# EAGLE board wDuino (EAGLE 6.6.0)
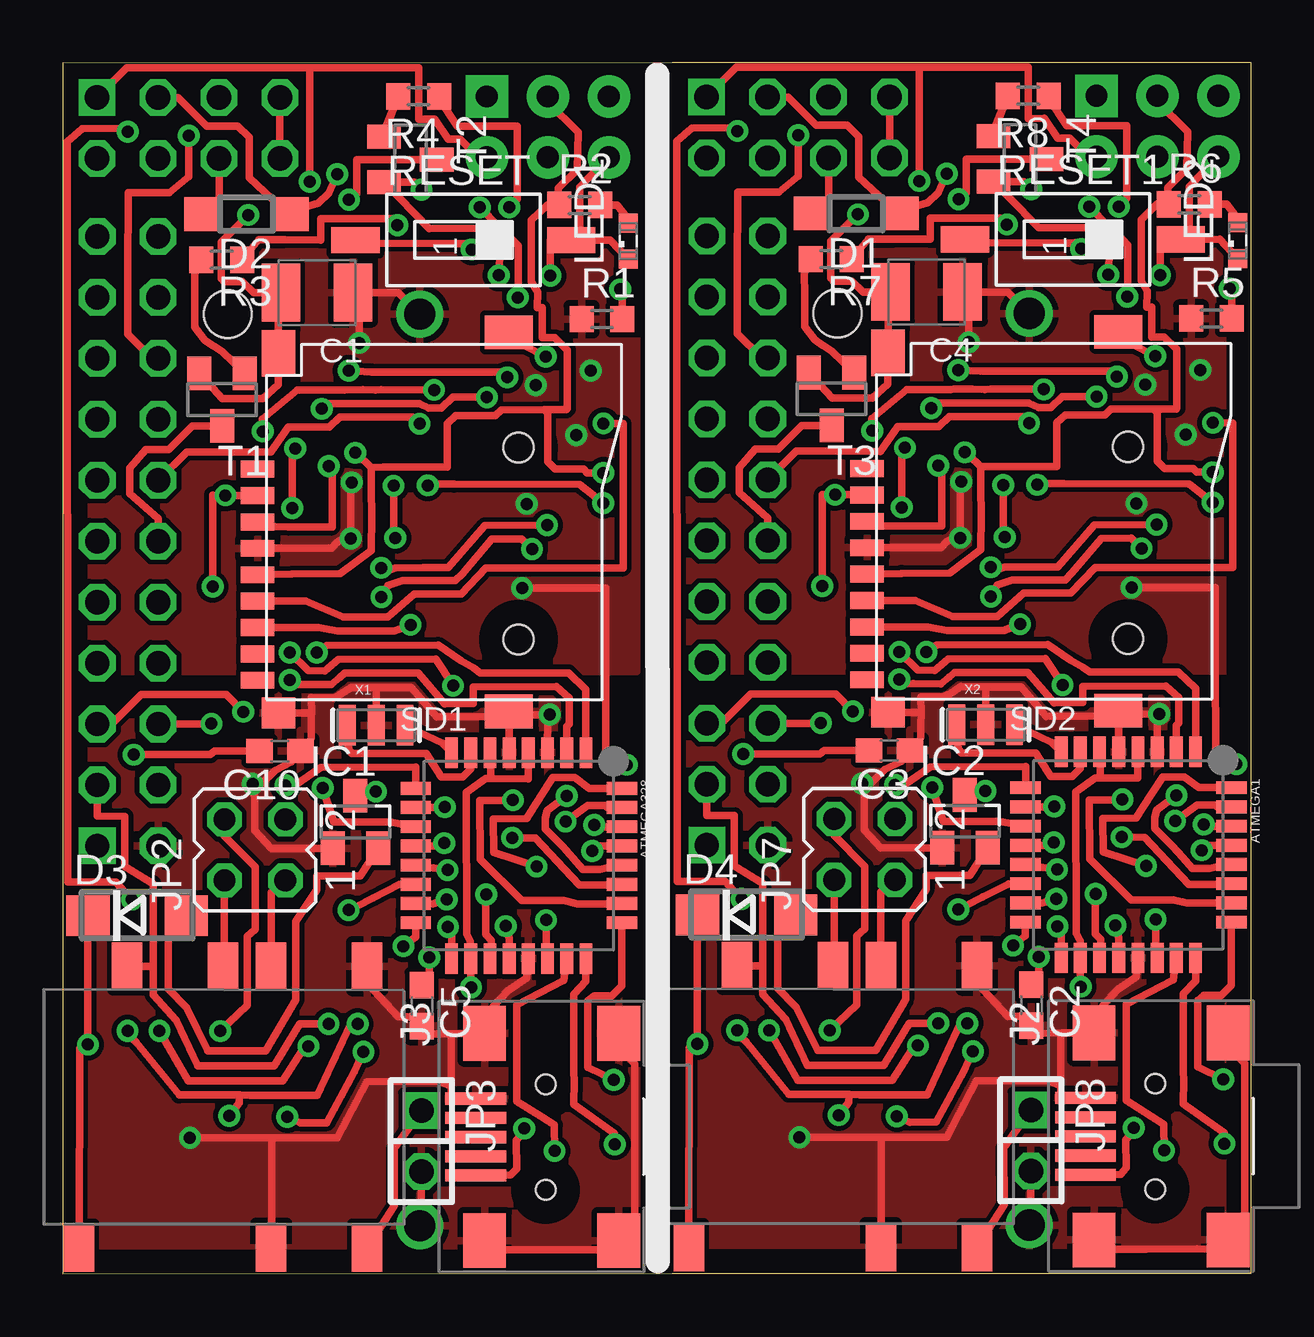
[diagram p0: board, top side]
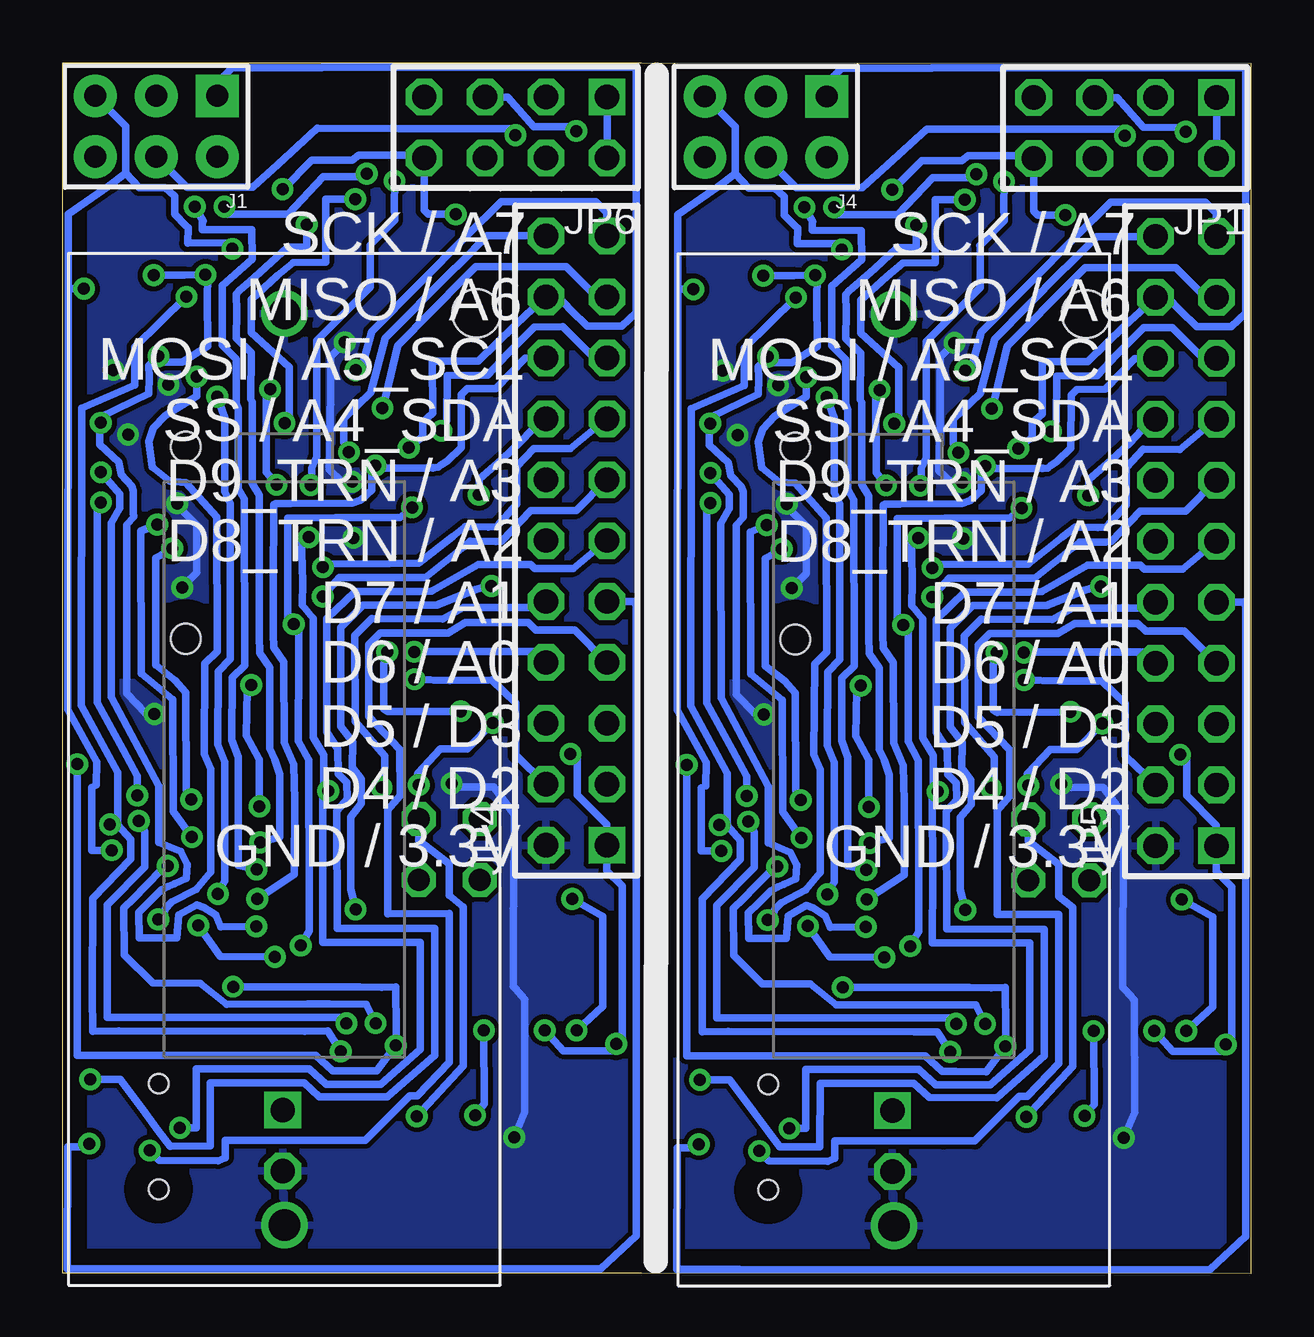
[diagram p1: board, bottom side, seen from below]

Size 49.51 x 50.5 mm. Coordinates in mm from the lower left corner, seen from the top.
Outline: 25.42,0.03 0,0 0,50.47 25.42,50.5
Outline: 25.4,0.03 49.51,0.03 49.51,50.49 25.4,50.49
Copper layers (1*16): Top 0.035mm / dielectric 1.5mm / Bottom 0.035mm
Design rules "default": minimum track width 10mil, minimum drill 24mil, track to track 8mil, track to pad 8mil, pad to pad 8mil, via to via 8mil, smd to smd 8mil, copper to edge 40mil, drill to drill 8mil, minimum pad ring 10mil, minimum via ring 8mil, stop-mask expansion 4mil, vias tented up to drill 0mil, thermal gap 10mil
Net classes: 1 power: width 0.381 mm, clearance 0.254 mm

## Footprints (pad centres in the part's own frame; a part is rotated, then mirrored left to right if it is on the bottom)
TQFP32-08 = smd 1.27 x 0.533: 1 -4.293,2.8; 2 -4.293,2; 3 -4.293,1.2; 4 -4.293,0.4; 5 -4.293,-0.4; 6 -4.293,-1.2; 7 -4.293,-2; 8 -4.293,-2.8; 17 4.293,-2.8; 18 4.293,-2; 19 4.293,-1.2; 20 4.293,-0.4; 21 4.293,0.4; 22 4.293,1.2; 23 4.293,2; 24 4.293,2.8 | smd 0.533 x 1.27: 9 -2.8,-4.293; 10 -2,-4.293; 11 -1.2,-4.293; 12 -0.4,-4.293; 13 0.4,-4.293; 14 1.2,-4.293; 15 2,-4.293; 16 2.8,-4.293; 25 2.8,4.293; 26 2,4.293; 27 1.2,4.293; 28 0.4,4.293; 29 -0.4,4.293; 30 -1.2,4.293; 31 -2,4.293; 32 -2.8,4.293
SMC_B = smd 1.6 x 2.4: + -1.5,0; - 1.5,0
C0603 = smd 1.1 x 1: 1 -0.85,0; 2 0.85,0
SOD123 = smd 1.4 x 1.4: A 1.9,0; C -1.9,0
DO214AC = smd 1.8 x 1.7: A 2.05,0; C -2.05,0
SOT23 = smd 1 x 1.4: 1 -0.95,-1.1; 2 0.95,-1.1; 3 0,1.1
HEAD3X2 = drill 0.914 pad 1.778 square: 1 0,0 | drill 0.914 pad 1.778: 2 0,2.54; 3 2.54,0; 4 2.54,2.54; 5 5.08,0; 6 5.08,2.54
USB-MINI-B_2 = smd 0.508 x 2.54: 1 0,0; 2 0.8,0; 3 1.6,0; 4 2.4,0; 5 3.2,0 | smd 2.286 x 1.778: 6 -2.717,5.948; 7 -2.717,0.36; 8 5.918,0.36; 9 5.918,5.948 | hole 0.813: -0.6,2.9; 3.8,2.9
2X04 = drill 1.016 square: 1 -3.81,-1.27 | drill 1.016 octagon: 2 -3.81,1.27; 3 -1.27,-1.27; 4 -1.27,1.27; 5 1.27,-1.27; 6 1.27,1.27; 7 3.81,-1.27; 8 3.81,1.27
JP2Q = drill 0.914 octagon: 1 -1.27,-1.27; 2 1.27,-1.27; 3 -1.27,1.27; 4 1.27,1.27
1X02 = drill 1.016 square: 1 -1.27,0 | drill 1.016 octagon: 2 1.27,0
2X11 = drill 1.016 square: 1 -12.7,-1.27 | drill 1.016 octagon: 2 -12.7,1.27; 3 -10.16,-1.27; 4 -10.16,1.27; 5 -7.62,-1.27; 6 -7.62,1.27; 7 -5.08,-1.27; 8 -5.08,1.27; 9 -2.54,-1.27; 10 -2.54,1.27; 11 0,-1.27; 12 0,1.27; 13 2.54,-1.27; 14 2.54,1.27; 15 5.08,-1.27; 16 5.08,1.27; 17 7.62,-1.27; 18 7.62,1.27; 19 10.16,-1.27; 20 10.16,1.27; 21 12.7,-1.27; 22 12.7,1.27
SML0603 = smd 0.8 x 0.8: A 0.75,0; C -0.75,0
R0603 = smd 1 x 1.1: 1 -0.85,0; 2 0.85,0
SMS-001 = smd 1.092 x 2.007: 1 0,-4.496; 2 0,4.496
TF-PULL = smd 0.7 x 1.4: 1 -2.2,-7.62; 2 -1.1,-7.62; 3 0,-7.62; 4 1.1,-7.62; 5 2.2,-7.62; 6 3.3,-7.62; 7 4.4,-7.62; 8 5.5,-7.62; 9 6.6,-7.62 | smd 1.4 x 2: S1 -7.9,2.85; S2 7.9,2.85 | smd 1.28 x 1.4: S3 7.96,-6.75 | smd 1.95 x 1.4: S4 -7.025,-6.75 | hole 1.25: -3.1,3.25; 4.9,3.25
KEYSTONE-2/3A = drill 1.3: +VE 0,19; -VE 0,-19 | hole 2: 8,19
ESP03 = smd 1.27 x 2: WIFI_EN 3.27,-6; WIFI_GND -6.73,-6; WIFI_GPIO15 -2.73,5.73; WIFI_RX -0.73,-6; WIFI_SWL -6.73,5.73; WIFI_TX -2.73,-6; WIFI_VDD 5.27,5.73
RESONATOR-SMD = smd 0.7 x 1.7: 1 -1.2,0; 2 0,0; 3 1.2,0

## Placement (x,y rotation side)
ATMEGA1  ATMega-328  [TQFP32-08]  44.39,17.47 270 top
ATMEGA328  ATMega-328  [TQFP32-08]  18.99,17.44 270 top
C1  100uF  [SMC_B]  10.59,40.9 180 top
C2  0.1  [C0603]  40.35,11.21 270 top
C3  100nF  [C0603]  34.44,21.83 180 top
C4  100uF  [SMC_B]  35.99,40.93 180 top
C5  0.1  [C0603]  14.95,11.18 270 top
C10  100nF  [C0603]  9.04,21.8 180 top
D1  [SOD123]  33.05,44.2 180 top
D2  [SOD123]  7.65,44.17 180 top
D3  [DO214AC]  3.09,14.94 0 top
D4  [DO214AC]  28.49,14.96 0 top
IC1  MCP1703CB  [SOT23]  12.19,18.84 0 top
IC2  MCP1703CB  [SOT23]  37.59,18.87 0 top
J1  HEAD3X2  [HEAD3X2]  43.06,49.11 180 bottom
J2  USB-MINI-B%C  [USB-MINI-B_2]  42.61,7.34 270 top
J3  USB-MINI-B%C  [USB-MINI-B_2]  17.21,7.31 270 top
J4  HEAD3X2  [HEAD3X2]  17.67,49.08 180 bottom
JP1  [2X04]  5.23,47.76 180 bottom
JP2  [JP2Q]  8,17.67 90 top
JP3  [1X02]  14.94,5.54 270 top
JP4  [2X11]  28.1,30.57 90 bottom
JP5  [2X11]  2.7,30.54 90 bottom
JP6  [2X04]  30.63,47.79 180 bottom
JP7  [JP2Q]  33.4,17.69 90 top
JP8  [1X02]  40.33,5.56 270 top
LED1  [SML0603]  23.55,43.05 90 top
LED2  [SML0603]  48.95,43.07 90 top
R1  10k  [R0603]  22.46,39.8 0 top
R2  220  [R0603]  21.53,44.56 0 top
R3  1 K  [R0603]  6.61,42.27 180 top
R4  1 K  [R0603]  14.82,49.09 180 top
R5  10k  [R0603]  47.86,39.82 0 top
R6  220  [R0603]  46.93,44.58 0 top
R7  1 K  [R0603]  32.01,42.3 180 top
R8  1 K  [R0603]  40.22,49.11 180 top
RESET  [SMS-001]  16.68,43.1 270 top
RESET1  [SMS-001]  42.08,43.12 270 top
SD1  TF-HOLDER  [TF-PULL]  15.73,31.35 270 top
SD2  TF-HOLDER  [TF-PULL]  41.13,31.37 270 top
T1  BC846  [SOT23]  6.63,36.45 180 top
T2  BC846  [SOT23]  14.48,46.45 270 top
T3  BC846  [SOT23]  32.03,36.47 180 top
T4  BC846  [SOT23]  39.88,46.48 270 top
U$1  BATT-CR123A  [KEYSTONE-2/3A]  40.27,21.04 0 bottom
U$2  ESP03  [ESP03]  31.35,6.85 180 top
U$3  BATT-CR123A  [KEYSTONE-2/3A]  14.87,21.01 0 bottom
U$5  ESP03  [ESP03]  5.95,6.82 180 top
X1  16 MHz  [RESONATOR-SMD]  13.05,22.87 0 top
X2  16 MHz  [RESONATOR-SMD]  38.45,22.9 0 top

## Library data of the parts
ATMEGA1 ATMEGA328 = LowPowerLab
C1-C5 C10 R1-R8 = resistor
D1-D4 = diode
IC1 IC2 = mcp1703
J1-J4 = MyCON2
JP1 JP3-JP6 JP8 = pinhead
JP2 JP7 = jumper
LED1 LED2 = led
RESET RESET1 = smd-special
SD1 SD2 = sd-mmc
T1-T4 = transistor
U$1 U$3 = eagle-library-edeca.net-v5
U$2 U$5 = RemoteHome
X1 X2 = SparkFun

## Nets
5V: IC1.3 J3.5 J4.2 JP1.1 JP1.2
5V1: IC2.3 J1.2 J2.5 JP6.1 JP6.2
A0: ATMEGA328.23 JP5.7
A1: ATMEGA328.24 JP5.9
A2: ATMEGA328.25 JP5.11
A3: ATMEGA328.26 JP5.13
A4: ATMEGA1.22 JP4.21
A4_SDA: ATMEGA328.27 JP5.15
A4_SDA1: ATMEGA1.27 JP4.15
A5: ATMEGA1.19 JP4.19
A5_SCL: ATMEGA328.28 JP5.17
A5_SCL1: ATMEGA1.28 JP4.17
A6: ATMEGA328.19 JP5.19
A7: ATMEGA328.22 JP5.21
A8: ATMEGA1.26 JP4.13
A9: ATMEGA1.25 JP4.11
A10: ATMEGA1.24 JP4.9
A11: ATMEGA1.23 JP4.7
AREF: ATMEGA328.20 C5.1
AREF1: ATMEGA1.20 C2.1
D0_RX: ATMEGA328.30 D2.C JP1.3 JP2.2
D0_RX1: ATMEGA1.30 D1.C JP6.3 JP7.2
D1: ATMEGA1.13 R8.1
D1_TX: ATMEGA328.31 JP1.5 JP2.4
D1_TX1: ATMEGA1.31 JP6.5 JP7.4
D2: ATMEGA328.32 JP5.3 U$5.WIFI_EN
D3: ATMEGA328.1 JP5.5
D4: ATMEGA328.2 JP5.4
D5: ATMEGA328.9 JP5.6
D6: ATMEGA328.10 JP5.8
D7: ATMEGA328.11 JP5.10
D8: ATMEGA328.12 R3.1
D8_P: JP5.12 T1.3
D8_P1: JP4.12 T3.3
D9: ATMEGA328.13 R4.1
D9_P: JP5.14 T2.3
D9_P1: JP4.14 T4.3
D10: ATMEGA1.12 R7.1
D10_SS: ATMEGA328.14 JP5.16 SD1.2
D10_SS1: ATMEGA1.14 JP4.16 SD2.2
D11: ATMEGA1.11 JP4.10
D11_MOSI: ATMEGA328.15 J4.4 JP5.18 SD1.3
D11_MOSI1: ATMEGA1.15 J1.4 JP4.18 SD2.3
D12: ATMEGA1.10 JP4.8
D12_MISO: ATMEGA328.16 J4.1 JP5.20 SD1.7
D12_MISO1: ATMEGA1.16 J1.1 JP4.20 SD2.7
D13: ATMEGA1.9 JP4.6
D13_SCK: ATMEGA328.17 J4.3 JP5.22 R2.1 SD1.5
D13_SCK1: ATMEGA1.17 J1.3 JP4.22 R6.1 SD2.5
D14: ATMEGA1.2 JP4.4
D15: ATMEGA1.1 JP4.5
D16: ATMEGA1.32 JP4.3 U$2.WIFI_EN
GND: ATMEGA328.3 ATMEGA328.5 ATMEGA328.21 C1.- C5.2 C10.1 IC1.1 J3.1 J3.6 J3.7 J3.8 J3.9 J4.6 JP1.7 JP1.8 JP3.2 JP5.2 LED1.C RESET.2 SD1.6 SD1.S1 SD1.S2 SD1.S3 SD1.S4 T1.2 T2.2 U$3.-VE U$5.WIFI_GND U$5.WIFI_GPIO15 X1.2
GND1: ATMEGA1.3 ATMEGA1.5 ATMEGA1.21 C2.2 C3.1 C4.- IC2.1 J1.6 J2.1 J2.6 J2.7 J2.8 J2.9 JP4.2 JP6.7 JP6.8 JP8.2 LED2.C RESET1.2 SD2.6 SD2.S1 SD2.S2 SD2.S3 SD2.S4 T3.2 T4.2 U$1.-VE U$2.WIFI_GND U$2.WIFI_GPIO15 X2.2
N$1: ATMEGA328.7 X1.1
N$2: D3.A IC1.2
N$3: ATMEGA1.7 X2.1
N$4: LED1.A R2.2
N$5: JP3.1 U$5.WIFI_SWL
N$6: R4.2 T2.1
N$7: D2.A JP1.6
N$8: R3.2 T1.1
N$9: ATMEGA1.8 X2.3
N$10: JP2.1 U$5.WIFI_TX
N$11: JP2.3 U$5.WIFI_RX
N$12: JP7.1 U$2.WIFI_TX
N$13: JP7.3 U$2.WIFI_RX
N$14: LED2.A R6.2
N$15: D1.A JP6.6
N$16: R7.2 T3.1
N$17: R8.2 T4.1
N$18: D4.A IC2.2
N$19: JP8.1 U$2.WIFI_SWL
N$21: ATMEGA328.8 X1.3
RST: ATMEGA328.29 J4.5 R1.2 RESET.1
RST1: ATMEGA1.29 J1.5 R5.2 RESET1.1
VCC: ATMEGA328.4 ATMEGA328.6 ATMEGA328.18 C1.+ C10.2 D3.C JP5.1 R1.1 SD1.4 U$3.+VE U$5.WIFI_VDD
VCC1: ATMEGA1.4 ATMEGA1.6 ATMEGA1.18 C3.2 C4.+ D4.C JP4.1 R5.1 SD2.4 U$1.+VE U$2.WIFI_VDD

## Tracks (layer width: path | path; a pad name or v marks a point on that pad's centre or on a via)
5V  (via drill 0.5)
  Top 0.305: 17.17,4.07 J3.5 18.67,4.12 18.91,4.39 18.89,5.57 19.2,5.92 v19.22,6.07 | v13.78,32.86 13.78,30.8 v13.85,30.68 | IC1.3 12.92,19.94 v13.04,20.1 | 10.28,50.27 14.34,50.27 14.83,50.27 14.83,48.13 15.48,48.14 16.06,47.31 16.55,47.31 17.32,46.54 J4.2 | 10.28,50.27 2.66,50.27 JP1.1 | v10.28,45.53 10.28,50.22 10.28,50.27
  Bottom 0.305: v13.78,32.86 13.74,33.2 13.73,33.56 13.52,34.04 13.52,37.72 13.52,38.38 13.52,38.87 11.28,41.11 11.28,42.85 11.3,42.87 11.16,43 10.28,43.9 10.29,44.49 v10.28,45.53 | v13.85,30.68 14.12,30.55 14.14,30.07 14.11,28.82 14.12,27.86 13.67,27.3 13.67,22.35 13.23,21.61 13.23,20.22 v13.04,20.1 13.27,19.82 13.26,16.58 13.28,13.8 9.21,13.79 9.2,9.34 10.86,7.88 13.13,7.88 13.84,8.53 18.54,8.52 18.54,6.07 v19.22,6.07 | JP1.2 JP1.1
5V1  (via drill 0.5)
  Top 0.305: 42.57,4.1 J2.5 44.07,4.15 44.3,4.42 44.29,5.6 44.6,5.95 v44.62,6.09 | v39.18,32.88 39.18,30.82 v39.25,30.71 | IC2.3 38.31,19.97 v38.44,20.13 | 35.67,50.3 39.74,50.3 40.23,50.3 40.23,48.16 40.88,48.17 41.46,47.33 41.95,47.33 42.72,46.57 J1.2 | 35.67,50.3 28.06,50.3 JP6.1 | v35.68,45.56 35.68,50.25 35.67,50.3
  Bottom 0.305: v39.18,32.88 39.13,33.23 39.12,33.59 38.92,34.06 38.92,37.75 38.92,38.4 38.92,38.9 36.68,41.14 36.68,42.88 36.7,42.89 36.56,43.03 35.68,43.92 35.69,44.52 v35.68,45.56 | v39.25,30.71 39.52,30.57 39.53,30.1 39.51,28.84 39.52,27.89 39.07,27.33 39.06,22.37 38.63,21.64 38.63,20.25 v38.44,20.13 38.67,19.84 38.66,16.61 38.67,13.82 34.61,13.82 34.6,9.37 36.26,7.91 38.53,7.9 39.24,8.56 43.94,8.54 43.94,6.1 v44.62,6.09 | JP6.2 JP6.1
A0  (via drill 0.5)
  Top 0.305: ATMEGA328.23 20.87,12.23 18.9,11.21 18.9,7.88 18.9,7.2 19.95,6.54 20.47,6.21 v20.48,5.12
  Bottom 0.305: v20.48,5.12 20.08,4.71 17.63,4.7 17.33,4.82 17.34,5.55 12.81,5.55 11.49,5.55 9.64,7.4 9.32,7.4 8,8.79 8,12.01 8,15 10.57,14.98 10.57,18.19 10.57,19.32 10.04,19.92 10.05,21.84 11.36,23.21 11.36,26.22 10.88,26.7 8.03,26.69 7.33,27.12 6.19,27.12 4.7,27.12 4.39,26.81 2.77,26.81 JP5.7
A1  (via drill 0.5)
  Top 0.305: ATMEGA328.24 21.79,12.2 21.29,11.65 21.29,8.41 21.3,8.08 21.29,7.07 22.98,5.87 v23,5.41
  Bottom 0.305: v23,5.41 23.14,5.27 23.91,5.27 23.91,0.19 21.32,0.2 20.56,0.18 1.68,0.19 0.2,1.57 0.2,27.86 0.34,28 JP5.9
A2  (via drill 0.5)
  Top 0.305: ATMEGA328.25 23.29,12.01 22.87,11.59 22.14,11.59 21.88,11.39 21.88,8.62 v22.95,8.09
  Bottom 0.305: v22.95,8.09 21.71,8.1 20.66,6.69 20.11,5.94 19.63,5.3 17.96,5.31 17.95,7.94 14.05,7.94 13.41,7.36 10.59,7.35 8.61,9.1 8.6,14.37 12.67,14.38 12.7,19.28 12.38,19.62 12.26,19.78 12.27,20.47 12.63,20.82 12.64,21.87 13.11,22.57 13.1,26.15 13.11,27.29 11.92,28.42 9.24,28.42 8.72,28.44 6.8,29.55 6.48,29.55 5.24,29.55 4.61,29.55 4.44,29.39 2.83,29.39 JP5.11
A3  (via drill 0.5)
  Top 0.305: v13.27,28.21 13.54,28.69 14.16,28.91 16.36,28.91 16.63,29.18 17.87,30.64 19.12,30.64 19.51,30.25 v19.55,30.22 | v18.75,19.75 18.57,19.74 17.37,19.73 17.39,17.28 19.12,15.56 20.87,15.56 21.43,15.44 ATMEGA328.26
  Bottom 0.305: v13.27,28.21 12.57,29 9,29 7.37,30.31 7.12,30.52 6.05,30.51 5.81,30.52 4.6,31.8 2.72,31.8 JP5.13 | v19.55,30.22 20.24,29.83 20.23,25.35 19.41,24.71 18.98,24.22 18.96,20.16 v18.75,19.75
A4  (via drill 0.5)
  Top 0.305: v37.3,37.68 38.25,37.62 43.63,37.62 43.91,37.51 v43.92,37.4 | v45.53,14.78 45.54,13.23 ATMEGA1.22
  Bottom 0.305: v37.3,37.68 37.05,37.77 36.63,39.28 32.7,43.26 31.23,44.7 27.3,44.7 26.83,44.24 JP4.21 | v43.92,37.4 43.92,36.6 45.23,35.78 45.73,35.25 45.92,34.69 45.77,33.64 45.05,33.04 44.37,32.98 43.09,31.54 43.06,25.94 43.58,25.44 43.6,21.68 43.34,21.06 43.34,16.77 43.94,16.04 44.96,15.5 45.23,15.21 45.34,14.91 v45.53,14.78
A4_SDA  (via drill 0.5)
  Top 0.305: v13.26,29.43 13.38,29.29 13.84,29.43 15.02,29.44 16.06,29.44 17.58,31.19 v20.17,31.21 | v18.72,18.18 19.67,18.18 21.51,16.21 23.25,16.21 ATMEGA328.27
  Bottom 0.305: v13.26,29.43 v13.26,29.44 13.12,29.57 10.51,29.59 9.28,29.6 7.85,30.72 7.33,31.13 6.37,31.11 6.03,31.13 5.18,32.06 5.19,33.62 4.47,34.38 2.95,34.37 JP5.15 | v20.17,31.21 20.85,30.93 20.84,25.01 19.53,23.93 19.51,19.26 v18.72,18.18
A4_SDA1  (via drill 0.5)
  Top 0.305: v38.66,29.46 38.78,29.31 39.24,29.46 40.42,29.47 41.46,29.46 42.98,31.22 v45.57,31.24 | v44.12,18.21 45.07,18.2 46.91,16.23 48.65,16.23 ATMEGA1.27
  Bottom 0.305: v38.66,29.46 38.52,29.6 35.91,29.62 34.68,29.63 33.25,30.74 32.72,31.15 31.77,31.14 31.42,31.16 30.58,32.08 30.59,33.65 29.87,34.4 28.35,34.4 JP4.15 | v38.66,29.46 | v45.57,31.24 46.24,30.96 46.24,25.04 44.93,23.95 44.91,19.29 v44.12,18.21
A5  (via drill 0.5)
  Top 0.305: v36.18,36.09 36.49,36.3 40.24,36.3 40.65,36.12 41.17,36.12 41.63,36.57 42.34,36.57 v43.07,36.57 | ATMEGA1.19 43.25,13.23 43.25,13.94 43.01,14.18 43.01,15.81 v43.04,15.84
  Bottom 0.305: v36.18,36.09 36.05,36.6 35.54,38.7 32.73,41.54 32.29,41.98 28.52,41.98 27.27,40.73 JP4.19 | v43.07,36.57 42.75,35.7 42.74,32.6 42.53,32.11 42.52,25.63 43.02,25.12 43.05,22.06 42.75,21.34 42.75,21.13 42.75,20.56 42.76,16.38 v43.04,15.84
A5_SCL  (via drill 0.5)
  Top 0.305: ATMEGA328.28 22.66,16.93 22.36,16.87 21.66,16.87 21.26,17.33 20.83,17.82 20.11,18.55 20.09,19 20.18,19.31 v21,19.92 | v8.32,35.12 8.31,35.64 9.77,36.85 11.59,36.85 11.72,36.85 12.5,36.86 13.01,36.84 13.26,36.86 v15.47,36.85 | v22.51,32.14 21.53,32.9 16.3,32.92 15.74,32.91 15.32,32.92 v15.2,32.87
  Bottom 0.305: v21,19.92 21,20.74 21.59,21.82 22.66,23.8 22.67,31.94 22.63,32.1 v22.51,32.14 | v8.32,35.12 8.1,35.54 8.08,37.43 6.39,37.45 5.58,38.32 5.54,38.36 4.46,39.45 3.28,39.45 1.99,38.16 JP5.17 | v15.47,36.85 v15.47,36.84 15.62,36.69 15.62,33.41 v15.2,32.87
A5_SCL1  (via drill 0.5)
  Top 0.305: ATMEGA1.28 48.06,16.96 47.76,16.9 47.06,16.9 46.66,17.35 46.23,17.85 45.5,18.58 45.49,19.02 45.58,19.34 v46.4,19.95 | v33.72,35.15 33.7,35.66 35.17,36.87 36.98,36.87 37.12,36.88 37.9,36.88 38.41,36.87 38.66,36.88 v40.86,36.87 | v47.91,32.16 46.92,32.93 41.7,32.95 41.14,32.94 40.72,32.94 v40.59,32.89
  Bottom 0.305: v46.4,19.95 46.39,20.76 46.98,21.84 48.06,23.83 48.07,31.96 48.03,32.13 v47.91,32.16 | v33.72,35.15 33.5,35.57 33.48,37.46 31.79,37.47 30.98,38.34 30.94,38.39 29.86,39.47 28.67,39.48 27.38,38.19 JP4.17 | v40.86,36.87 41.02,36.71 41.02,33.43 v40.59,32.89
A6  (via drill 0.5)
  Top 0.305: v10.79,36.06 11.1,36.27 14.84,36.27 15.25,36.09 15.77,36.1 16.23,36.54 16.95,36.54 v17.67,36.54 | ATMEGA328.19 17.85,13.21 17.85,13.91 17.61,14.15 17.61,15.79 v17.64,15.82
  Bottom 0.305: v10.79,36.06 10.65,36.58 10.14,38.67 7.33,41.52 6.89,41.96 3.12,41.96 1.87,40.7 JP5.19 | v17.67,36.54 17.36,35.67 17.35,32.58 17.14,32.09 17.12,25.61 17.62,25.09 17.65,22.04 17.35,21.32 17.35,21.1 17.35,20.53 17.36,16.35 v17.64,15.82
A7  (via drill 0.5)
  Top 0.305: v11.91,37.65 12.85,37.6 18.23,37.6 18.51,37.48 v18.52,37.38 | v20.13,14.75 20.14,13.2 ATMEGA328.22
  Bottom 0.305: v11.91,37.65 11.65,37.75 11.23,39.25 7.3,43.23 5.83,44.67 1.9,44.67 1.43,44.22 JP5.21 | v18.52,37.38 18.52,36.58 19.83,35.76 20.33,35.22 20.52,34.66 20.37,33.61 19.65,33.02 18.98,32.96 17.69,31.52 17.67,25.92 18.18,25.42 18.2,21.65 17.94,21.03 17.94,16.74 18.55,16.01 19.57,15.48 19.84,15.19 19.95,14.88 v20.13,14.75
A8  (via drill 0.5)
  Top 0.305: v38.67,28.24 38.94,28.71 39.56,28.93 41.75,28.93 42.03,29.21 43.27,30.66 44.52,30.66 44.91,30.28 v44.94,30.25 | v44.15,19.78 43.97,19.76 42.77,19.76 42.78,17.3 44.52,15.59 46.27,15.59 46.83,15.46 ATMEGA1.26
  Bottom 0.305: v38.67,28.24 37.97,29.02 34.4,29.03 32.77,30.33 32.52,30.54 31.45,30.54 31.21,30.55 29.99,31.82 28.12,31.82 JP4.13 | v44.94,30.25 45.64,29.85 45.63,25.37 44.81,24.73 44.38,24.25 44.35,20.18 v44.15,19.78
A9  (via drill 0.5)
  Top 0.305: ATMEGA1.25 48.69,12.03 48.27,11.62 47.54,11.62 47.28,11.41 47.28,8.64 v48.35,8.12
  Bottom 0.305: v48.35,8.12 47.11,8.12 46.06,6.72 45.51,5.96 45.03,5.33 43.36,5.33 43.35,7.97 39.44,7.97 38.81,7.39 35.98,7.37 34.01,9.12 34,14.39 38.07,14.4 38.09,19.31 37.77,19.65 37.66,19.81 37.67,20.49 38.02,20.84 38.04,21.89 38.5,22.6 38.5,26.18 38.5,27.31 37.32,28.45 34.64,28.45 34.12,28.46 32.2,29.58 31.88,29.58 30.63,29.57 30.01,29.57 29.84,29.41 28.23,29.41 JP4.11
A10  (via drill 0.5)
  Top 0.305: ATMEGA1.24 47.19,12.22 46.69,11.67 46.69,8.43 46.69,8.1 46.69,7.09 48.38,5.89 v48.4,5.43
  Bottom 0.305: v48.4,5.43 48.54,5.29 49.3,5.29 49.31,0.22 46.71,0.22 45.96,0.21 27.08,0.21 25.6,1.59 25.6,27.89 25.74,28.03 JP4.9
A11  (via drill 0.5)
  Top 0.305: ATMEGA1.23 46.26,12.25 44.3,11.24 44.3,7.91 44.3,7.23 45.35,6.57 45.87,6.24 v45.88,5.15
  Bottom 0.305: v45.88,5.15 45.48,4.74 43.03,4.72 42.73,4.84 42.73,5.57 38.21,5.57 36.89,5.58 35.04,7.43 34.72,7.43 33.4,8.81 33.4,12.03 33.4,15.02 35.96,15.01 35.97,18.22 35.97,19.35 35.44,19.95 35.45,21.87 36.76,23.23 36.76,26.25 36.28,26.73 33.43,26.72 32.73,27.15 31.59,27.15 30.1,27.15 29.79,26.83 28.17,26.83 JP4.7
AREF  (via drill 0.5)
  Top 0.305: C5.1 15.26,12.45 v15.26,13.19 | v18.45,14.5 18.48,14.44 18.6,13.99 ATMEGA328.20
  Bottom 0.305: v15.26,13.19 17.55,13.21 v18.45,14.5
AREF1  (via drill 0.5)
  Top 0.305: C2.1 40.66,12.47 v40.66,13.22 | v43.85,14.53 43.88,14.46 44,14.02 ATMEGA1.20
  Bottom 0.305: v40.66,13.22 42.95,13.24 v43.85,14.53
D0_RX  (via drill 0.5)
  Top 0.305: v18.95,40.71 18.97,40.77 18.97,42.87 18.5,43.35 18.19,43.64 v17.37,44.46 | v22.14,18.71 22.26,18.73 22.6,18.62 23.27,18.62 ATMEGA328.30 | v12.52,9.25 12.14,8.42 11,6.31 9.88,6.3 v9.35,6.55 | JP1.3 4.82,49.03 6,47.85 7.29,47.85 7.75,47.38 7.75,45.69 9.38,44.18 D2.C 10.08,44.46 10.63,44.63 11.07,45.05 v11.43,45.84
  Bottom 0.305: v18.95,40.71 21.1,38.6 21.11,37.03 23.31,36.07 23.33,23.68 21.81,20.87 21.81,18.7 | 21.81,18.7 v22.14,18.71 | 21.81,18.7 21.27,18.08 21.27,17.27 22.86,15.64 22.86,11.62 22.85,10.08 21.77,10.11 14.03,10.1 13.06,10.1 12.67,9.48 v12.52,9.25 | JP2.2 9.27,18.04 8.01,17.07 8.01,15.75 7.42,15.27 7.42,8.66 v9.35,6.55 | v17.37,44.46 17.34,44.4 17.25,44.16 14.71,44.16 13.25,45.7 11.55,45.7 v11.43,45.84
D0_RX1  (via drill 0.5)
  Top 0.305: v44.35,40.73 44.37,40.79 44.37,42.89 43.9,43.38 43.59,43.66 v42.76,44.48 | v47.54,18.74 47.66,18.76 48,18.65 48.66,18.65 ATMEGA1.30 | v37.92,9.28 37.54,8.45 36.4,6.33 35.28,6.33 v34.75,6.57 | JP6.3 30.21,49.06 31.4,47.88 32.69,47.88 33.15,47.41 33.15,45.72 34.78,44.21 D1.C 35.48,44.48 36.03,44.65 36.47,45.08 v36.83,45.87
  Bottom 0.305: v44.35,40.73 46.5,38.63 46.51,37.06 48.71,36.1 48.73,23.71 47.21,20.9 47.21,18.73 | 47.21,18.73 v47.54,18.74 | 47.21,18.73 46.67,18.1 46.67,17.3 48.26,15.66 48.26,11.65 48.25,10.11 47.16,10.13 39.43,10.12 38.46,10.12 38.07,9.51 v37.92,9.28 | JP7.2 34.67,18.07 33.41,17.1 33.41,15.77 32.81,15.3 32.81,8.68 v34.75,6.57 | v42.76,44.48 42.74,44.43 42.64,44.18 40.1,44.18 38.65,45.73 36.95,45.73 v36.83,45.87
D1  (via drill 0.5)
  Top 0.305: v41.42,16.86 40.83,16.95 40.12,17.05 ATMEGA1.13 | R8.1 41.06,49.02 41.83,47.86 44.32,47.86 44.33,47.54 44.33,44.83 v44,44.48
  Bottom 0.305: v44,44.48 43.65,43.88 43.68,43.88 43.68,43.54 41.63,43.52 41.62,42.3 42.85,41.2 42.85,39.26 42.86,38.72 42.27,38.13 42.27,36.28 42.18,36.04 42.19,32.74 41.93,32.29 41.91,25.36 42.44,24.86 42.45,22.26 42.19,21.55 42.19,20.05 42.18,17.02 v41.42,16.86
D1_TX  (via drill 0.5)
  Top 0.305: ATMEGA328.31 22.69,19.45 22.59,19.53 21.86,19.53 v20.94,18.86 | v12.28,10.43 11.98,10.39 10.61,7.45 7.81,7.45 7.36,7.47 | 7.36,7.47 4.84,7.46 3.06,9.65 2.71,9.98 v2.69,10.13 | v2.88,15.6 2.55,15.94 2.19,16.33 0.2,16.34 0.18,47.03 0.18,47.2 0.8,47.74 2.55,47.76 v2.71,47.61 | JP2.4 6.73,18.25 8.02,16.97 8.02,14.36 7.68,14.07 7.68,11.2 v6.55,10.12 | v6.92,6.6 7.35,7.13 7.36,7.47
  Bottom 0.305: v20.94,18.86 20.82,18.69 20.7,18.43 20.7,16.95 22.26,15.36 22.26,12.03 22.24,10.68 13.93,10.68 13.5,10.67 12.57,10.67 v12.28,10.43 | v2.69,10.13 1.59,11.13 1.59,11.42 1.59,14.88 v2.88,15.6 | v6.55,10.12 6.53,7.07 v6.92,6.6 | v2.71,47.61 2.96,47.79 4.48,47.8 5.55,49.03 6.46,49.03 JP1.5
D1_TX1  (via drill 0.5)
  Top 0.305: ATMEGA1.31 48.09,19.48 47.98,19.56 47.26,19.56 v46.34,18.88 | v37.68,10.45 37.38,10.41 36.01,7.47 33.2,7.48 32.76,7.49 | 32.76,7.49 30.23,7.49 28.46,9.68 28.11,10.01 v28.09,10.16 | v28.27,15.63 27.95,15.96 27.59,16.36 25.6,16.36 25.58,47.06 25.58,47.23 26.2,47.77 27.95,47.78 v28.11,47.64 | JP7.4 32.13,18.27 33.41,16.99 33.41,14.38 33.08,14.1 33.08,11.22 v31.95,10.15 | v32.32,6.62 32.75,7.16 32.76,7.49
  Bottom 0.305: v46.34,18.88 46.22,18.71 46.09,18.45 46.09,16.98 47.66,15.38 47.66,12.06 47.64,10.71 39.33,10.7 38.89,10.7 37.97,10.7 v37.68,10.45 | v28.09,10.16 26.99,11.16 26.99,11.44 26.99,14.9 v28.27,15.63 | v31.95,10.15 31.93,7.09 v32.32,6.62 | v28.11,47.64 28.36,47.81 29.88,47.83 30.95,49.06 31.86,49.06 JP6.5
D2  (via drill 0.5)
  Top 0.305: ATMEGA328.32 21.93,20.25 21.33,20.7 20.42,20.69 19.59,19.42 19.33,18.98 17.94,18.96 17.95,17.57 v19.73,16.98 | 2.71,13.16 U$5.WIFI_EN 3.76,12.82 | 3.76,12.82 3.76,16.26 2.58,16.99 2.58,18.6 2.58,19.08 1.42,19.08 JP5.3 | 3.76,12.82 3.75,12.69 3.76,11.64 4.72,10.58 5.61,8.68 8.81,8.68 9.7,10.14 9.86,10.42 v11.07,10.43
  Bottom 0.305: v19.73,16.98 19.95,16.87 20.65,16.15 21.15,15.64 21.57,15.24 21.55,13.28 20.35,12.1 18.36,12.1 17.28,11.22 13.9,11.22 13,11.22 11.46,11.21 v11.07,10.43
D3  (via drill 0.5)
  Top 0.305: ATMEGA328.1 21.79,24.37 21.07,25.06 17.39,25.06 17.11,25.25 16.57,25.57 15.63,26.21 11,26.2 10.56,25.83 v10.58,25.9 | JP5.5 2.03,22.92 3.26,24.15 6.79,24.15 v7.52,23.43
  Bottom 0.305: v7.52,23.43 10.56,23.41 10.72,23.52 10.74,25.39 v10.58,25.9
D4  (via drill 0.5)
  Top 0.305: v9.45,24.76 9.65,24.57 10.02,24.58 11.18,24.57 11.54,24.86 11.75,25.05 14.81,25.04 15.9,23.77 17.1,23.79 17.09,24 17.09,24.47 20.56,24.48 21.09,24 21.09,22.93 20.98,22.83 ATMEGA328.2
  Bottom 0.305: v9.45,24.76 7.98,24.72 6.22,24.73 5.22,23.78 5.22,21.6 JP5.4
D5  (via drill 0.5)
  Top 0.305: ATMEGA328.9 14.71,20.24 14.71,21.13 10.73,21.11 9.65,20.36 v9.27,20.36 | JP5.6 6.17,22.92 v6.19,22.94
  Bottom 0.305: v6.19,22.94 7.24,21.85 8.37,21.87 9.31,20.85 9.31,20.39 v9.27,20.36
D6  (via drill 0.5)
  Top 0.305: ATMEGA328.10 15.89,19.44 v15.91,19.46 | v16.25,24.52 15.54,25.62 11.48,25.61 10.92,25.12 10.22,25.15 v9.46,25.91
  Bottom 0.305: v15.91,19.46 15.91,21.42 16.45,22.42 16.42,24.35 v16.25,24.52 | v9.46,25.91 9.26,25.92 4.42,25.92 JP5.8
D7  (via drill 0.5)
  Top 0.305: ATMEGA328.11 13.63,18.84 11.48,18.83 11.29,18.85 v10.82,20.26
  Bottom 0.305: v10.82,20.26 10.7,20.5 10.69,21.56 11.92,23 11.93,26.59 11.23,27.3 8.27,27.28 7.42,27.75 4.22,27.75 JP5.10
D8  (via drill 0.5)
  Top 0.305: ATMEGA328.12 15.7,17.84 v15.88,17.96 | v13.94,43.72 13.93,43.77 13.93,43.98 10.74,43.98 10.74,43.1 9.24,43.11 8.16,43.1 R3.1
  Bottom 0.305: v15.88,17.96 15.06,18.18 15.07,20.79 15.27,21.42 15.47,21.87 15.48,25.25 15.9,25.86 15.92,26.57 15.92,32.44 16.21,32.91 16.21,36.31 16.27,36.45 16.26,38.38 16.87,38.99 16.86,40.09 16.88,40.82 16.73,40.98 16.31,41.35 15.66,41.91 14.74,42.77 13.94,42.77 v13.94,43.72
D8_P
  Top 0.305: T1.3 5.38,35.35 4.41,34.36 3.44,34.36 2.79,33.59 2.77,32.54 3.97,31.48 JP5.12
D8_P1
  Top 0.305: T3.3 30.78,35.37 29.8,34.38 28.84,34.38 28.19,33.61 28.17,32.56 29.37,31.51 JP4.12 | T3.3
D9  (via drill 0.5)
  Top 0.305: v16.03,16.84 15.43,16.92 14.72,17.02 ATMEGA328.13 | R4.1 15.66,49 16.43,47.83 18.92,47.83 18.93,47.51 18.93,44.81 v18.6,44.46
  Bottom 0.305: v18.6,44.46 18.25,43.86 18.28,43.86 18.28,43.51 16.23,43.5 16.22,42.27 17.45,41.17 17.45,39.24 17.46,38.69 16.87,38.11 16.87,36.26 16.79,36.02 16.79,32.72 16.54,32.27 16.52,25.34 17.04,24.84 17.05,22.24 16.8,21.53 16.79,20.03 16.79,17 v16.03,16.84
D9_P  (via drill 0.5)
  Top 0.305: v14.86,35.44 14.58,35.71 11.53,35.71 11.1,35.3 10.98,35.3 9.39,35.29 8.66,34.26 7.26,34.27 5.15,34.27 JP5.14 | T2.3 12.23,46.45 12.24,45.37 12.24,45.02 v11.92,44.78
  Bottom 0.305: v14.86,35.44 14.87,35.46 14.67,35.66 14.67,37.77 16.25,39.22 16.26,39.56 16.26,40.6 15.16,41.58 14.5,42.14 13.15,42.15 13.14,44.78 v11.92,44.78
D9_P1  (via drill 0.5)
  Top 0.305: v40.26,35.46 39.98,35.74 36.93,35.74 36.5,35.32 36.37,35.32 34.78,35.32 34.06,34.29 32.66,34.29 30.55,34.29 JP4.14 | T4.3 37.63,46.48 37.64,45.4 37.64,45.05 v37.32,44.8
  Bottom 0.305: v40.26,35.46 40.27,35.49 40.07,35.69 40.07,37.8 41.65,39.24 41.66,39.58 41.66,40.62 40.56,41.61 39.89,42.16 38.54,42.18 38.54,44.8 v37.32,44.8
D10  (via drill 0.5)
  Top 0.305: ATMEGA1.12 41.1,17.87 v41.28,17.98 | v39.34,43.75 39.33,43.8 39.33,44.01 36.14,44 36.14,43.13 34.64,43.14 33.56,43.13 R7.1
  Bottom 0.305: v41.28,17.98 40.46,18.21 40.47,20.82 40.66,21.44 40.87,21.9 40.88,25.28 41.3,25.88 41.32,26.59 41.32,32.46 41.6,32.94 41.6,36.34 41.67,36.48 41.66,38.4 42.27,39.01 42.26,40.12 42.28,40.85 42.12,41 41.71,41.37 41.06,41.94 40.13,42.8 39.34,42.8 v39.34,43.75
D10_SS  (via drill 0.5)
  Top 0.305: ATMEGA328.14 14.01,16.23 12.93,15.68 12.24,15.33 v11.9,15.17 | SD1.2 7.92,32.45 7.86,32.45 v6.77,32.46 6.24,32.47 v6.24,28.65
  Bottom 0.305: v11.9,15.17 12.11,16.03 12.1,19.04 11.66,19.58 11.67,20.6 12.04,21.09 12.03,22.16 12.52,22.79 12.51,25.25 12.51,26.92 11.59,27.87 8.53,27.87 6.9,28.5 6.33,28.67 v6.24,28.65 | v6.77,32.46 6.74,33.11 5.79,33.95 5.05,34.64 4.54,35.17 JP5.16
D10_SS1  (via drill 0.5)
  Top 0.305: ATMEGA1.14 39.41,16.25 38.33,15.71 37.64,15.35 v37.3,15.2 | SD2.2 33.32,32.47 33.25,32.48 v32.17,32.48 31.64,32.49 v31.64,28.68
  Bottom 0.305: v37.3,15.2 37.51,16.06 37.5,19.06 37.06,19.61 37.07,20.63 37.43,21.12 37.43,22.18 37.92,22.82 37.91,25.27 37.91,26.94 36.98,27.89 33.92,27.89 32.3,28.53 31.73,28.7 v31.64,28.68 | v32.17,32.48 v32.16,32.49 32.14,33.13 31.18,33.97 30.45,34.66 29.94,35.2 JP4.16
D11  (via drill 0.5)
  Top 0.305: ATMEGA1.11 39.03,18.87 36.88,18.86 36.69,18.87 v36.22,20.28
  Bottom 0.305: v36.22,20.28 36.1,20.52 36.09,21.58 37.32,23.02 37.33,26.61 36.63,27.32 33.67,27.31 32.81,27.78 29.62,27.78 JP4.10
D11_MOSI  (via drill 0.5)
  Top 0.305: ATMEGA328.15 15.42,15.44 v16,15.61 | SD1.3 8.83,31.15 9.39,31.14 11.22,31.14 11.22,32.12 11.22,32.68 11.22,33.44 v11.07,33.67 | JP5.18 3.71,38.16 2.71,39.17 2.71,41.68 2.72,45.07 4.43,45.08 5.24,45.74 v5.24,47.45
  Bottom 0.305: v16,15.61 14.45,16.64 14.45,19.7 14.48,21.21 14.88,22.14 14.89,25.49 15.31,26.08 15.32,26.65 15.33,28.58 15.32,32.05 15.23,32.09 14.63,32.08 12.04,32.1 11.7,32.24 11.24,32.65 11.24,33.38 v11.07,33.67 10.74,33.67 10.65,33.58 8.86,33.58 8.66,33.59 8.69,33.57 8.47,33.6 8.35,33.69 8.09,33.86 7.49,34.43 7.49,36.62 7.25,36.87 6.07,36.88 4.83,38.16 JP5.18 | v5.24,47.45 5.49,47.72 10.1,47.72 13.47,47.72 13.5,47.72 15.15,46.21 16.18,45.28 18.95,45.28 J4.4
D11_MOSI1  (via drill 0.5)
  Top 0.305: ATMEGA1.15 40.81,15.46 v41.39,15.63 | SD2.3 34.23,31.17 34.78,31.17 36.62,31.16 36.62,32.15 36.62,32.7 36.62,33.47 v36.47,33.7 | JP4.18 29.11,38.19 28.1,39.2 28.11,41.7 28.12,45.1 29.83,45.1 30.64,45.77 v30.64,47.47
  Bottom 0.305: v41.39,15.63 39.85,16.66 39.85,19.73 39.88,21.23 40.28,22.16 40.29,25.51 40.71,26.11 40.72,26.67 40.73,28.61 40.72,32.08 40.63,32.12 40.03,32.11 37.44,32.13 37.09,32.26 36.64,32.68 36.64,33.4 v36.47,33.7 36.14,33.7 36.05,33.6 34.26,33.6 34.06,33.62 34.09,33.6 33.87,33.63 33.74,33.72 33.49,33.89 32.89,34.45 32.89,36.65 32.65,36.9 31.46,36.9 30.23,38.18 JP4.18 | v30.64,47.47 30.89,47.74 35.5,47.74 38.87,47.75 38.9,47.75 40.55,46.24 41.58,45.31 44.34,45.31 J1.4
D12  (via drill 0.5)
  Top 0.305: ATMEGA1.10 41.29,19.47 v41.31,19.49 | v41.65,24.55 40.93,25.65 36.88,25.64 36.32,25.15 35.62,25.17 v34.85,25.93
  Bottom 0.305: v41.31,19.49 41.31,21.45 41.85,22.44 41.82,24.37 v41.65,24.55 | v34.85,25.93 34.66,25.94 29.82,25.94 JP4.8
D12_MISO  (via drill 0.5)
  Top 0.305: ATMEGA328.16 14.7,14.06 v14.19,13.66 | SD1.7 10.63,26.95 11.45,26.8 13.81,26.8 v14.48,27.06 | v9.69,34.41 9.55,34.06 v9.55,31.93
  Bottom 0.305: v14.19,13.66 13.84,14.28 13.83,15.71 13.86,21.4 14.28,22.19 14.28,25.68 14.28,26.85 v14.48,27.06 14.74,27.31 14.74,27.77 14.73,28.82 14.74,31.49 13.87,31.49 12.73,31.51 11.25,31.51 10.06,31.51 v9.55,31.93 | v9.69,34.41 9.11,34.88 9.11,35.49 8.68,35.85 8.7,38.02 6.8,38.03 5.27,39.51 4.84,39.91 JP5.20 3.46,40.7 2.93,40.15 2.25,39.49 0.81,39.48 0.21,40.05 0.2,42.73 0.21,50.08 0.19,50.27 13.29,50.27 13.3,50.26 17.03,50.26 17.67,49.63 J4.1
D12_MISO1  (via drill 0.5)
  Top 0.305: ATMEGA1.16 40.1,14.09 v39.59,13.69 | SD2.7 36.03,26.97 36.84,26.82 39.21,26.82 v39.88,27.08 | v35.08,34.44 34.95,34.08 v34.95,31.95
  Bottom 0.305: v39.59,13.69 39.24,14.3 39.23,15.74 39.26,21.43 39.68,22.21 39.67,25.7 39.67,26.88 v39.88,27.08 40.14,27.34 40.14,27.8 40.13,28.85 40.14,31.51 39.26,31.52 38.13,31.53 36.65,31.53 35.46,31.54 v34.95,31.95 | v35.08,34.44 34.51,34.9 34.51,35.51 34.08,35.88 34.1,38.05 32.2,38.06 30.67,39.53 30.24,39.94 JP4.20 28.86,40.73 28.33,40.17 27.64,39.51 26.21,39.5 25.61,40.08 25.6,42.76 25.61,50.1 25.59,50.3 38.69,50.3 38.7,50.28 42.43,50.28 43.06,49.65 J1.1
D13  (via drill 0.5)
  Top 0.305: ATMEGA1.9 40.11,21.15 36.13,21.14 35.05,20.39 v34.67,20.38 | JP4.6 31.57,22.95 v31.59,22.96
  Bottom 0.305: v31.59,22.96 32.64,21.88 33.77,21.89 34.71,20.87 34.71,20.41 v34.67,20.38
D13_SCK  (via drill 0.5)
  Top 0.305: v12.18,34.23 12.67,33.79 12.86,33.62 | SD1.5 9.54,29.17 11.55,29.19 12.85,30.16 12.86,31.62 12.86,31.83 12.85,32.5 12.86,33.62 | 20.06,36.02 18.27,36.02 18.01,35.78 16.36,35.78 16.02,35.45 16.02,35.17 16.02,33.62 15.06,33.62 13.34,33.63 12.86,33.62 | 20.06,36.02 20.98,36.02 21.02,36.06 21.02,38.52 20.5,39.02 19.97,39.02 19.97,40.27 19.77,40.27 19.77,40.94 19.52,41.37 19.52,43.92 20.18,44.56 R2.1 20.65,45.26 21.43,46.04 21.46,47.58 20.21,48.84 J4.3 | ATMEGA328.17 16.19,14.27 v16.04,14.46 | v22.52,33.39 21.85,33.39 21.7,33.55 20.52,33.55 20.2,33.86 20.2,35.88 20.06,36.02
  Bottom 0.305: v12.18,34.23 12.39,34.62 12.39,35.62 11.27,36.71 10.67,38.98 7.9,41.78 7.57,42.1 6.42,43.24 JP5.22 | v22.52,33.39 21.72,32.49 21.72,31.9 22.08,31.27 22.07,24.02 20.1,20.32 20.1,18.59 20.1,17.96 19.18,17.58 18.91,17.05 18.96,16.46 19.45,16.23 19.71,16.13 20.01,15.98 20.51,15.47 20.93,15.05 20.92,13.98 19.35,13.98 19.27,14.93 18.52,15.36 18.23,15.26 17.73,14.93 17.53,14.45 v16.04,14.46
D13_SCK1  (via drill 0.5)
  Top 0.305: v37.58,34.25 38.07,33.81 38.25,33.65 | SD2.5 34.94,29.2 36.95,29.21 38.25,30.19 38.26,31.64 38.26,31.85 38.25,32.52 38.25,33.65 | 45.46,36.05 43.67,36.04 43.41,35.8 41.76,35.8 41.41,35.48 41.41,35.19 41.41,33.65 40.46,33.65 38.74,33.65 38.25,33.65 | 45.46,36.05 46.38,36.05 46.42,36.09 46.42,38.54 45.89,39.05 45.37,39.05 45.37,40.3 45.16,40.3 45.17,40.96 44.92,41.4 44.92,43.94 45.58,44.58 R6.1 46.05,45.28 46.83,46.06 46.86,47.61 45.6,48.86 J1.3 | ATMEGA1.17 41.59,14.29 v41.44,14.49 | v47.91,33.42 47.25,33.42 47.1,33.57 45.91,33.57 45.6,33.88 45.6,35.9 45.46,36.05
  Bottom 0.305: v37.58,34.25 37.79,34.65 37.79,35.65 36.66,36.73 36.07,39 33.3,41.81 32.97,42.12 31.82,43.27 JP4.22 | v47.91,33.42 47.12,32.51 47.12,31.92 47.48,31.3 47.47,24.04 45.5,20.35 45.5,18.61 45.5,17.98 44.58,17.61 44.31,17.07 44.36,16.48 44.85,16.25 45.11,16.15 45.41,16 45.9,15.5 46.33,15.07 46.32,14 44.75,14 44.66,14.96 43.92,15.38 43.63,15.29 43.13,14.96 42.93,14.47 v41.44,14.49
D14  (via drill 0.5)
  Top 0.305: v34.85,24.79 35.05,24.6 35.42,24.6 36.57,24.59 36.93,24.88 37.15,25.07 40.2,25.07 41.3,23.79 42.5,23.81 42.49,24.03 42.49,24.5 45.95,24.51 46.49,24.03 46.49,22.96 46.38,22.85 46.38,21.77 ATMEGA1.2
  Bottom 0.305: v34.85,24.79 33.38,24.75 31.62,24.75 30.62,23.81 30.62,21.62 JP4.4
D15  (via drill 0.5)
  Top 0.305: ATMEGA1.1 47.19,24.39 46.47,25.08 42.78,25.08 42.51,25.27 41.97,25.6 41.03,26.23 36.4,26.22 35.96,25.86 v35.98,25.93 | JP4.5 27.43,22.95 28.66,24.18 32.19,24.18 v32.92,23.46
  Bottom 0.305: v32.92,23.46 35.96,23.44 36.12,23.54 36.14,25.42 v35.98,25.93
D16  (via drill 0.5)
  Top 0.305: ATMEGA1.32 47.33,20.27 46.73,20.73 45.82,20.71 44.99,19.45 44.73,19.01 43.34,18.99 43.35,17.59 v45.13,17 | 28.11,13.18 U$2.WIFI_EN 29.15,12.85 | 29.15,12.85 29.16,16.29 27.98,17.01 27.98,18.62 27.98,19.11 26.82,19.11 JP4.3 | 29.15,12.85 29.15,12.72 29.16,11.66 30.11,10.61 31.01,8.7 34.2,8.7 35.09,10.17 35.26,10.44 v36.47,10.45
  Bottom 0.305: v45.13,17 45.35,16.89 46.05,16.17 46.55,15.66 46.96,15.26 46.95,13.3 45.75,12.13 43.76,12.12 42.67,11.24 39.3,11.25 38.4,11.25 36.86,11.24 v36.47,10.45
GND  (via drill 0.5)
  Top 0.305: v20.32,41.61 20.31,43.09 RESET.2 | U$5.WIFI_GPIO15 8.69,2.82 8.69,3.67 8.69,5.61 8.75,5.67 | 8.75,38.64 8.68,38.34 8.95,38.34 SD1.S4 | U$5.WIFI_GND 12.69,12.08 13.98,10.72 14.03,10.71 14.48,10.71 C5.2 | ATMEGA328.5 18.6,21.73 18.6,23.44 18.88,23.43 | 20.2,23.3 19.39,23.31 19.02,23.38 18.88,23.43 | 20.2,23.3 ATMEGA328.3 | X1.2 13.06,23.39 | 13.06,23.39 13.05,24.44 14.52,24.45 15.58,23.21 18.09,23.23 18.02,23.34 18.61,23.39 18.88,23.43 | 10.36,23.32 10.35,22.89 10.35,22.35 10.05,21.7 C10.1 9.52,21.34 8.84,21 8.27,20.42 v7.9,20.42 7.99,19.87 7.99,18.48 8.69,17.74 IC1.1 | 10.36,23.32 10.36,23.39 10.35,24.02 11.26,24.02 11.52,24.14 12,24.46 13.06,24.45 13.06,23.39 | J3.6 23.16,10.05 23.16,10.06 23.16,9.43 23.84,8.76 23.84,4.64 | J3.9 23.84,2.07 23.84,2.87 | ATMEGA328.21 19.34,12.35 18.53,11.81 17.96,11.17 17.71,10.86 J3.7 16.21,10.02 | 20.2,23.3 20.24,23.35 v20.28,23.32 | C5.2 14.99,10.03 | 16.18,7.8 16.18,7.32 J3.1 | SD1.6 10.12,28.05 11.68,27.38 13.54,27.38 14.63,28.35 16.61,28.35 17.62,29.42 19.61,29.42 23.34,29.43 23.34,35.44 v22.52,35.46 | 23.84,4.64 23.84,2.87 | v5.29,5.67 6.93,5.67 8.75,5.67 | 8.75,5.67 11.43,5.67 12.65,8.02 15.7,8.03 16.18,7.8 | 23.84,5.08 23.84,4.64 | SD1.S3 10.35,23.39 10.36,23.32 | SD1.S1 19.18,38.72 v20.12,38.23 | 16.21,10.02 15.37,10.01 C5.2 | J3.8 17.57,1.35 17.91,1 19.73,1 21.85,1.02 23.84,1.01 23.84,2.87 | T1.2 6.65,36.48 8.32,36.48 8.97,37.06 SD1.S4 | v18.16,41.62 18.18,41.65 18.2,42.73 17.34,43.6 15.27,43.58 14.02,44.87 T2.2 14.63,45.5 v14.95,45.19 | 16.18,7.8 16.18,9.98 16.21,10.02 | JP3.2 14.94,2.59 14.87,2.52 U$3.-VE | JP1.7 JP1.8 | J4.6 22.72,46.54 21.54,45.3 21.54,43.43 RESET.2
  Top 0.305: LED1.C 22.8,43.1 RESET.2 | SD1.S4 8.98,40.8 C1.- 7.95,40.9 7.47,41.36 6.7,41.36 6.6,41.48 6.6,43.02 v7.73,44.14
  Bottom 0.305: 5.29,19.13 6.15,20.28 7.71,20.28 v7.9,20.42 | v20.28,23.32 20.65,23.33 21.44,24.16 21.43,31.19 21.15,31.55 21.16,31.7 21.16,32.6 21.24,32.82 21.66,33.29 21.78,33.82 22.56,34.55 22.57,35.43 | 22.57,35.43 22.55,35.69 20.53,36.68 20.51,37.33 20.52,37.83 v20.12,38.23 19.87,37.98 19.14,37.98 18.07,38.64 18.08,40.73 18.06,41.45 v18.16,41.62 19.05,41.62 19.72,41.62 v20.32,41.61 | 5.29,19.13 5.29,17.72 5.31,16.73 5.33,13.8 5.33,11.95 5.23,11.85 4.86,11.42 4.85,6.74 v5.29,5.67 | v22.52,35.46 22.57,35.43 | 5.28,19.14 5.29,19.13 | v7.73,44.14 8.88,44.14 9.05,44.31 JP1.8 9.15,46.6 11.77,46.61 12.04,46.4 13.72,46.4 14.92,45.19 v14.95,45.19
  pour Bottom: 23.88,24.65 0.18,24.64 0.18,0.18 23.91,0.21 23.91,22.44
  pour Top: 23.9,24.63 0.19,24.65 0.26,0.21 23.9,0.21 23.9,20.37 23.92,22.5
GND1  (via drill 0.5)
  Top 0.305: v45.71,41.63 45.71,43.12 RESET1.2 | U$2.WIFI_GPIO15 34.09,2.84 34.09,3.7 34.09,5.64 34.15,5.7 | 34.14,38.67 34.08,38.37 34.35,38.37 SD2.S4 | U$2.WIFI_GND 38.09,12.11 39.38,10.75 39.43,10.73 39.88,10.73 C2.2 | ATMEGA1.5 44,23.47 44.28,23.46 | 45.6,23.33 44.79,23.33 44.41,23.41 44.28,23.46 | 45.6,23.33 ATMEGA1.3 | X2.2 38.46,23.41 | 38.46,23.41 38.45,24.47 39.92,24.48 40.98,23.24 43.48,23.25 43.42,23.36 44,23.41 44.28,23.46 | 35.76,23.35 35.75,22.91 35.75,22.37 35.45,21.73 C3.1 34.92,21.36 34.24,21.02 33.67,20.45 v33.3,20.45 33.39,19.9 33.39,18.5 34.09,17.77 IC2.1 | 35.76,23.35 35.76,23.41 35.75,24.05 36.66,24.04 36.92,24.16 37.4,24.48 38.46,24.47 38.46,23.41 | J2.6 48.56,10.08 48.56,9.46 49.23,8.79 49.23,4.67 | J2.9 49.23,2.09 49.23,2.9 | ATMEGA1.21 44.73,12.38 43.92,11.84 43.35,11.2 43.11,10.88 J2.7 41.61,10.04 | 45.6,23.33 45.63,23.38 v45.68,23.35 | C2.2 40.39,10.05 | 41.58,7.83 41.58,7.34 J2.1 | SD2.6 35.52,28.07 37.08,27.4 38.94,27.4 40.03,28.37 42,28.38 43.02,29.45 45,29.45 48.74,29.46 48.74,35.46 v47.92,35.48 | 49.23,4.67 49.23,2.9 | v30.69,5.7 32.33,5.7 34.15,5.7 | 34.15,5.7 36.83,5.7 38.05,8.04 41.1,8.05 41.58,7.83 | 49.23,5.11 49.23,4.67 | SD2.S3 35.74,23.41 35.76,23.35 | SD2.S1 44.58,38.74 v45.52,38.26 | 41.61,10.04 40.76,10.03 C2.2 | J2.8 42.97,1.37 43.31,1.03 45.12,1.03 47.25,1.04 49.23,1.04 49.23,2.9 | T3.2 32.05,36.51 33.72,36.51 34.37,37.09 SD2.S4 | v43.55,41.65 43.58,41.68 43.6,42.75 42.74,43.62 40.66,43.6 39.42,44.89 T4.2 40.03,45.53 v40.34,45.22 | 41.58,7.83 41.58,10.01 41.61,10.04 | JP8.2 40.33,2.61 40.27,2.54 U$1.-VE | JP6.7 JP6.8 | J1.6 48.12,46.57 46.93,45.33 46.93,43.46 RESET1.2
  Top 0.305: LED2.C 48.2,43.12 RESET1.2 | SD2.S4 34.38,40.82 C4.- 33.35,40.93 32.87,41.38 32.1,41.38 32,41.51 32,43.04 v33.12,44.16
  Bottom 0.305: 30.69,19.16 31.55,20.31 33.1,20.31 v33.3,20.45 | v45.68,23.35 46.05,23.36 46.84,24.19 46.83,31.22 46.55,31.58 46.55,31.73 46.55,32.63 46.63,32.85 47.06,33.31 47.18,33.85 47.96,34.58 47.97,35.46 | 47.97,35.46 47.94,35.71 45.92,36.7 45.91,37.35 45.92,37.85 v45.52,38.26 45.27,38.01 44.53,38.01 43.47,38.67 43.48,40.76 43.45,41.48 v43.55,41.65 44.45,41.64 45.12,41.64 v45.71,41.63 | 30.69,19.16 30.69,17.74 30.71,16.76 30.73,13.82 30.73,11.98 30.63,11.88 30.26,11.44 30.24,6.77 v30.69,5.7 | v47.92,35.48 47.97,35.46 | 30.68,19.16 30.69,19.16 | v33.12,44.16 34.28,44.16 34.44,44.33 JP6.8 34.55,46.63 37.17,46.64 37.44,46.42 39.12,46.42 40.32,45.22 v40.34,45.22
  pour Bottom: 49.28,24.68 25.58,24.66 25.58,0.21 49.31,0.23 49.31,22.47
  pour Top: 49.3,24.65 25.59,24.67 25.65,0.24 49.3,0.24 49.3,20.39 49.32,22.52
N$1
  Top 0.305: ATMEGA328.7 16.99,21.04 16.67,20.71 15.76,20.71 15.14,21.69 12.03,21.69 11.91,21.87 11.89,22.09 X1.1
N$2
  Top 0.305: IC1.2 12.39,16.59 10.57,16.59 10.57,16 9.71,14.69 9.71,11.43 8.46,9.3 6.04,9.3 5.16,11.08 4.38,11.89 4.38,14.54 D3.A
N$3
  Top 0.305: ATMEGA1.7 42.39,21.07 42.07,20.74 41.16,20.74 40.54,21.72 37.42,21.72 37.31,21.9 37.29,22.12 X2.1
N$4
  Top 0.305: R2.2 22.84,44.56 23.1,44.56 23.56,43.97 LED1.A
N$5
  Top 0.305: JP3.1 13.81,5.23 13.81,2.85 U$5.WIFI_SWL
N$6
  Top 0.305: R4.2 13.5,47.88 T2.1
N$7
  Top 0.305: JP1.6 6.5,44.68 D2.A
N$8
  Top 0.305: T1.1 6.64,38.45 6.33,38.65 6.25,38.7 5.92,38.93 5.5,39.47 5.5,40.8 5.49,41.68 R3.2
N$9
  Top 0.305: X2.3 41.2,22.15 ATMEGA1.8
N$10
  Top 0.305: JP2.1 8.68,15.9 U$5.WIFI_TX
N$11
  Top 0.305: 6.88,12.74 U$5.WIFI_RX 6.73,12.88 JP2.3
N$12
  Top 0.305: JP7.1 34.08,15.92 U$2.WIFI_TX
N$13
  Top 0.305: 32.28,12.77 U$2.WIFI_RX 32.13,12.9 JP7.3
N$14
  Top 0.305: R6.2 48.24,44.58 48.49,44.58 48.96,43.99 LED2.A
N$15
  Top 0.305: JP6.6 31.9,44.7 D1.A
N$16
  Top 0.305: T3.1 32.04,38.47 31.73,38.67 31.64,38.73 31.32,38.95 30.9,39.5 30.9,40.83 30.89,41.7 R7.2
N$17
  Top 0.305: R8.2 38.9,47.9 T4.1
N$18
  Top 0.305: IC2.2 37.79,16.62 35.97,16.62 35.97,16.02 35.11,14.71 35.11,11.46 33.86,9.32 31.44,9.32 30.56,11.11 29.78,11.91 29.78,14.57 D4.A
N$19
  Top 0.305: JP8.1 39.21,5.25 39.21,2.88 U$2.WIFI_SWL
N$21
  Top 0.305: X1.3 15.81,22.12 ATMEGA328.8
RST  (via drill 0.5)
  Top 0.305: v17.04,42.7 16.75,42.95 16.59,42.94 16.32,42.95 15.65,42.95 12.74,42.96 RESET.1 | ATMEGA328.29 22.27,17.84 v22.06,17.64 | R1.2 23.31,40.86 v23.22,41.04
  Bottom 0.305: v17.04,42.7 17.02,42.7 17.17,42.95 18.9,42.94 18.88,43.58 18.97,43.67 19.45,44.14 19.45,44.9 19.84,45.26 20.92,45.26 21.49,45.86 | v22.06,17.64 22.89,17.64 22.89,20.26 22.7,20.35 22.7,21.32 23.9,23.51 23.87,41.89 | 23.87,41.89 23.87,44.15 22.18,45.35 21.49,45.86 | 21.49,45.86 21.48,47.81 J4.5 | v23.22,41.04 23.87,41.04 23.87,41.89
RST1  (via drill 0.5)
  Top 0.305: v42.43,42.73 42.15,42.98 41.99,42.97 41.71,42.98 41.05,42.98 38.14,42.98 RESET1.1 | ATMEGA1.29 47.67,17.87 v47.46,17.66 | R5.2 48.71,40.89 v48.62,41.07
  Bottom 0.305: v42.43,42.73 42.42,42.73 42.57,42.98 44.3,42.96 44.28,43.61 44.37,43.69 44.84,44.17 44.84,44.93 45.24,45.28 46.32,45.28 46.89,45.89 | v47.46,17.66 48.29,17.66 48.29,20.29 48.1,20.38 48.09,21.35 49.3,23.53 49.27,41.92 | 49.27,41.92 49.27,44.18 47.57,45.37 46.89,45.89 | 46.89,45.89 46.87,47.84 J1.5 | v48.62,41.07 49.27,41.07 49.27,41.92
VCC  (via drill 0.5)
  Top 0.305: v17.01,11.95 16.99,12.68 ATMEGA328.18 16.98,13.86 16.83,14.17 16.81,20.06 17.61,20.66 17.83,20.66 | ATMEGA328.6 17.83,21.74 17.83,20.66 | C10.2 7.47,21.8 6.33,21.8 6.14,21.65 v2.95,21.65 | SD1.4 8.58,30.25 11.2,30.25 11.4,30.49 12,30.84 12,32.54 v12.03,33 | U$5.WIFI_VDD 0.7,9.39 v1.04,9.56 1.04,10.01 D3.C | v23.5,21.23 22.63,21.65 22.63,22.34 22.62,24.87 22.62,28.59 v19.13,28.59 | ATMEGA328.4 19.39,20.64 17.83,20.66 | v10.23,9.5 9.97,9.31 9.16,8.06 5.22,8.06 v4.02,10.13 | U$3.+VE 13.98,40.9 C1.+ 12.35,40.64 v12.35,38.81
  Bottom 0.305: v17.01,11.95 13.9,11.94 11.72,11.94 10.82,11.93 10.22,11.95 10.22,10.19 v10.23,9.5 11.03,8.44 12.28,8.45 12.85,8.45 13.57,9.09 16.01,9.1 23.51,9.1 v23.5,21.23 | v12.03,33 12.48,33 13,33.5 12.99,34.38 12.95,34.91 12.95,37.41 12.95,38.21 v12.35,38.81 | v19.33,32.1 19.33,32 18.52,31.18 18.52,29.2 v19.13,28.59 | v4.02,10.13 3.77,9.87 3.25,9.28 1.24,9.28 v1.04,9.56 0.8,9.81 0.8,16.14 1.43,16.77 JP5.1 1.43,18.7 2.67,19.94 2.67,21.61 v2.95,21.65
  other vias: 11.99,30.66 19.7,37.05 21.99,37.66 21.38,34.97
  pour Bottom: 23.59,25.1 0.19,25.11 0.19,50.29 23.91,50.29 23.91,25.11
  pour Top: 23.62,25.1 0.19,25.11 0.19,50.27 23.91,50.27 23.91,25.11
VCC1  (via drill 0.5)
  Top 0.305: v42.41,11.97 42.39,12.71 ATMEGA1.18 42.38,13.88 42.23,14.19 42.21,20.09 43.01,20.68 43.23,20.68 | ATMEGA1.6 43.23,21.76 43.23,20.68 | C3.2 32.87,21.82 31.73,21.82 31.54,21.67 v28.35,21.67 | SD2.4 33.98,30.28 36.6,30.28 36.8,30.52 37.4,30.86 37.4,32.57 v37.43,33.02 | U$2.WIFI_VDD 26.1,9.42 v26.44,9.59 26.44,10.03 D4.C | v48.9,21.25 48.03,21.68 48.02,22.37 48.02,24.89 48.02,28.62 v44.53,28.62 | ATMEGA1.4 44.79,20.67 43.23,20.68 | v35.63,9.52 35.37,9.34 34.56,8.08 30.62,8.08 v29.42,10.16 | U$1.+VE 39.37,40.93 C4.+ 37.75,40.67 v37.75,38.83
  Bottom 0.305: v42.41,11.97 39.3,11.96 37.12,11.96 36.21,11.96 35.62,11.97 35.62,10.21 v35.63,9.52 36.42,8.46 37.68,8.47 38.25,8.47 38.97,9.11 41.41,9.12 48.9,9.12 v48.9,21.25 | v37.43,33.02 37.88,33.03 38.4,33.52 38.39,34.41 38.35,34.94 38.34,37.44 38.34,38.24 v37.75,38.83 | v44.73,32.12 44.73,32.02 43.92,31.21 43.92,29.23 v44.53,28.62 | v29.42,10.16 29.16,9.89 28.64,9.31 26.64,9.3 v26.44,9.59 26.2,9.83 26.2,16.17 26.83,16.8 JP4.1 26.83,18.73 28.07,19.96 28.07,21.64 v28.35,21.67
  other vias: 37.39,30.69 45.1,37.08 47.39,37.68 46.78,34.99
  pour Bottom: 48.99,25.12 25.58,25.14 25.58,50.31 49.3,50.31 49.3,25.14
  pour Top: 49.01,25.12 25.58,25.14 25.58,50.29 49.3,50.29 49.3,25.14

## Text on the board
bPlace: SS / A4_SDA | SS / A4_SDA | D9_TRN / A3 | D9_TRN / A3 | D8_TRN / A2 | D8_TRN / A2 | D7 / A1 | D7 / A1 | D6 / A0 | D6 / A0 | D5 / D3 | D5 / D3 | D4 / D2 | D4 / D2 | GND / 3.3V | GND / 3.3V
bNames: SCK / A7 | SCK / A7 | MISO / A6 | MISO / A6 | MOSI / A5_SCL | MOSI / A5_SCL